# Altium PCB PCB1.pcbdoc
Units mil, origin at the board's own origin, x right, y up, seen from the top; angles counter-clockwise.
Board outline 6326.8 x 4043.3 mil, 2 copper layers (Top Layer, Bottom Layer), stack 62.2 mil thick; 51 components, 51 nets, 243 pads, 102 vias.
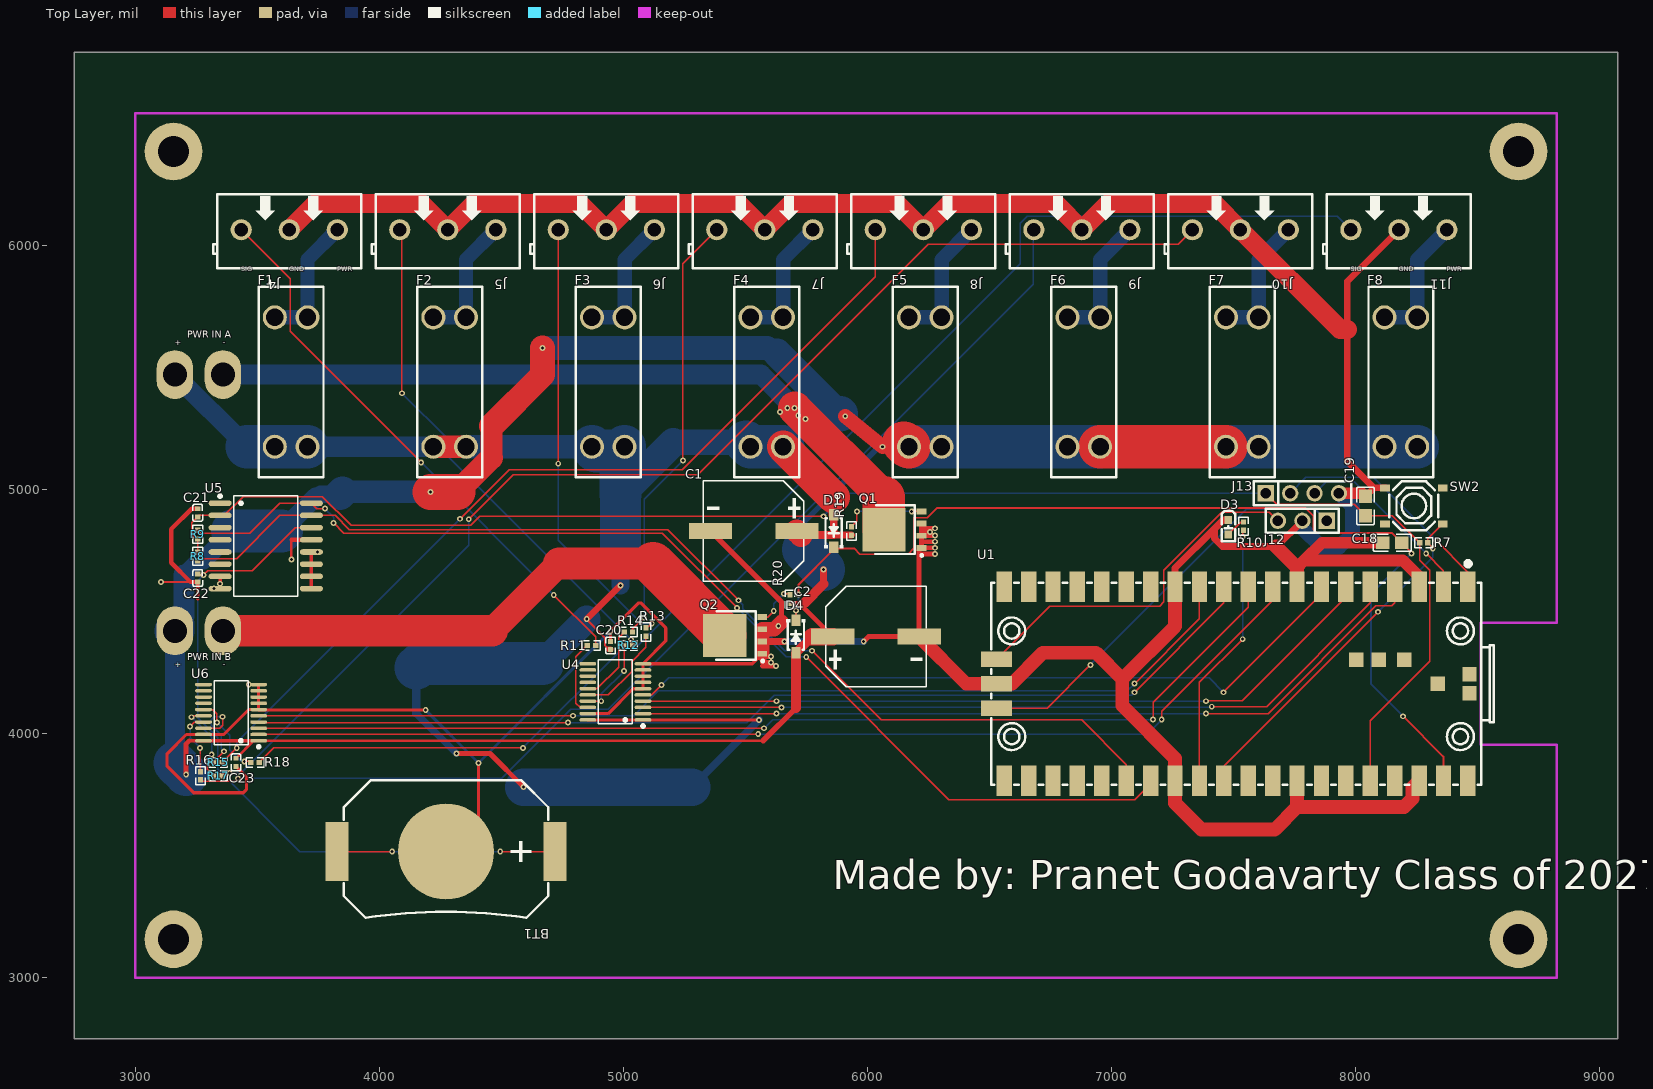
[diagram p0: Top Layer view]
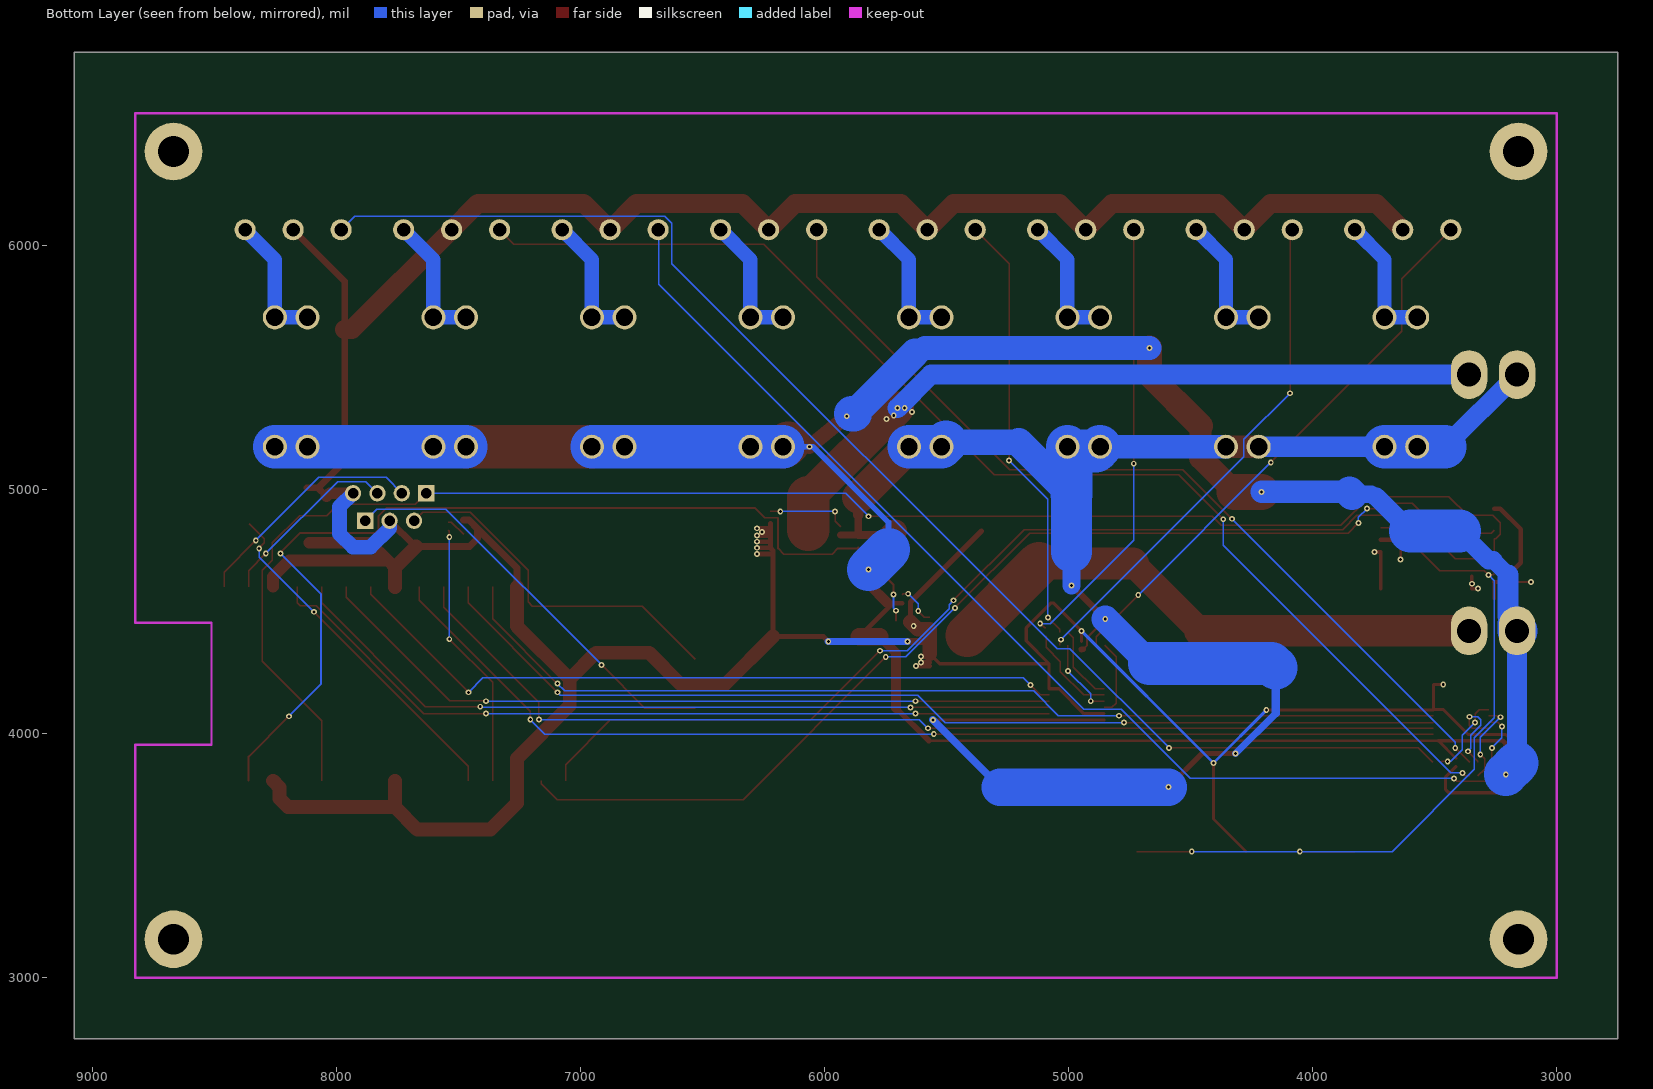
[diagram p1: Bottom Layer view, seen from below]

## Layer stack, top to bottom
Top Solder Mask Layer: solder mask 0.4, Dk 3.3
Top Layer: signal copper 1.4
Dielectric1: surface 59.4, FR4, Dk 4.5
Bottom Layer: signal copper 1.4
Bottom Solder Mask Layer: solder mask 0.4, Dk 3.3

## Board outline
9076.8,2750 2750,2750 2750,6793.3 9076.8,6793.3

## Design rules (kind name [scope] priority, off if disabled: settings)
BoardOutlineClearance copperThickness1oz [All] p0: genericclearance=10 ignorepadtopadclearanceinfootprint=FALSE except(0: Arc-SplitContinuation Track-SplitContinuation SMDPad-SplitContinuation THPad-SplitContinuation Via-SplitContinuation Fill-SplitContinuation Poly-SplitContinuation Region-SplitContinuation Text-SplitContinuation)
BoardOutlineClearance copperThickness2oz [All] p0: genericclearance=10 ignorepadtopadclearanceinfootprint=FALSE except(0: Arc-SplitContinuation Track-SplitContinuation SMDPad-SplitContinuation THPad-SplitContinuation Via-SplitContinuation Fill-SplitContinuation Poly-SplitContinuation Region-SplitContinuation Text-SplitContinuation)
BoardOutlineClearance copilot_router_net_0_spacing [All] p0: genericclearance=10 ignorepadtopadclearanceinfootprint=FALSE except(0: Arc-SplitContinuation Track-SplitContinuation SMDPad-SplitContinuation THPad-SplitContinuation Via-SplitContinuation Fill-SplitContinuation Poly-SplitContinuation Region-SplitContinuation Text-SplitContinuation)
BoardOutlineClearance otherClearance [All] p0: genericclearance=10 ignorepadtopadclearanceinfootprint=FALSE except(0: Arc-SplitContinuation Track-SplitContinuation SMDPad-SplitContinuation THPad-SplitContinuation Via-SplitContinuation Fill-SplitContinuation Poly-SplitContinuation Region-SplitContinuation Text-SplitContinuation)
Clearance copperThickness1oz [All] p1: gap=7 ignorepadtopadclearanceinfootprint=FALSE
Clearance copperThickness2oz [All] p1: gap=7 ignorepadtopadclearanceinfootprint=FALSE
Clearance copilot_router_net_0_spacing [(InNet('VBAT') OR InNet('GND') OR InNet('VIN_A') OR InNet('VIN_B') OR InNet('5V_SYS') OR InNet('3V3') OR InNet('LED_STAT_A') OR InNet('5V_ROW1') OR InNet('5V_ROW2') OR InNet('5V_ROW3') OR InNet('5V_ROW4') OR InNet('5V_ROW5') OR InNet('5V_ROW6') OR InNet('5V_ROW7') OR InNet('5V_ROW8') OR InNet('DATA1') OR InNet('DATA2') OR InNet('DATA3') OR InNet('DATA4') OR InNet('DATA5') OR InNet('DATA6') OR InNet('DATA7') OR InNet('DATA8') OR InNet('SWCLK') OR InNet('SWDIO') OR InNet('UART_TX') OR InNet('UART_RX') OR InNet('Q1_G') OR InNet('GND_IN_A') OR InNet('Q2_G') OR InNet('GND_IN_B') OR InNet('RUN') OR InNet('I2C_SDA') OR InNet('I2C_SCL') OR InNet('LED_STAT') OR InNet('DOUT1') OR InNet('DOUT2') OR InNet('DOUT3') OR InNet('DOUT4') OR InNet('DOUT5') OR InNet('DOUT6') OR InNet('DOUT7') OR InNet('DOUT8') OR InNet('DIN8') OR InNet('DIN7') OR InNet('DIN6') OR InNet('DIN5') OR InNet('DIN4') OR InNet('DIN3') OR InNet('DIN2') OR InNet('DIN1'))] p1: gap=7 ignorepadtopadclearanceinfootprint=FALSE
Clearance otherClearance [All] p1: gap=7 ignorepadtopadclearanceinfootprint=FALSE
DiffPairsRouting differentialPair [All] p1: maxuncoupledlength=10 minlimit=6 maxlimit=Infinity mostfreqgap=6 toplayer_minwidth=5 toplayer_prefwidth=10 toplayer_maxwidth=100 bottomlayer_minwidth=5 bottomlayer_prefwidth=10 bottomlayer_maxwidth=100
PasteMaskExpansion pasteMaskExpansion [All] p1: expansion=0
PlaneConnect innerPlane [All] p1: planeconnectstyle=Relief reliefexpansion=20 reliefentries=4 reliefconductorwidth=10 reliefairgap=10
PolygonConnect copperRegion [All] p1: connectstyle=Relief reliefentries=4 reliefconductorwidth=10 polygonreliefangle="90 Angle" airgapwidth=10
PolygonConnect copilot_router_zone_0_copper [All] p1: connectstyle=Direct reliefentries=4 reliefconductorwidth=10 polygonreliefangle="90 Angle" airgapwidth=10
RoutingVias viaSize [All] p1: viastyle="Through Hole" holewidth=12.0078 minholewidth=12.0078 maxholewidth=12.0078 width=12.0078 minwidth=12.0078 maxwidth=12.0078
RoutingVias copilot_router_net_0_via [All] p1: viastyle="Through Hole" holewidth=12.0078 minholewidth=12.0078 maxholewidth=12.0078 width=12.0078 minwidth=12.0078 maxwidth=12.0078
SolderMaskExpansion solderMaskExpansion [IsVia] p1: useseparateexpansions=TRUE expansion=-1000 expansionbottom=-1000
SolderMaskExpansion solderMaskExpansion [All] p2: useseparateexpansions=TRUE expansion=2 expansionbottom=2
Width copperThickness1oz [All] p1: maxlimit=45 minlimit=6 preferedwidth=6
Width copperThickness2oz [All] p1: maxlimit=100 minlimit=8 preferedwidth=10
Width copilot_router_net_0_track [All] p1: maxlimit=45 minlimit=6 preferedwidth=6
Width copilot_router_net_1_track [All] p1: maxlimit=98 minlimit=59 preferedwidth=59
Width copilot_router_net_9_track [All] p1: maxlimit=47 minlimit=6 preferedwidth=8
Width copilot_router_net_35_track [All] p1: maxlimit=177 minlimit=6 preferedwidth=138
Width copilot_router_net_34_track [All] p1: maxlimit=148 minlimit=6 preferedwidth=108

## Components (designator, comment, footprint, x,y, rotation, side; value= is the part's Value field where it differs from the comment)
BT1 "MY-2032-12" BAT-SMD_MY-2032-12 4274.2,3517 r0 top
C1 "1000uF" CAP-SMD_BD10.0-L10.3-W10.3-FD 5535,4830.7 r180 top
C2 "1000uF" CAP-SMD_BD10.0-L10.3-W10.3-FD 6035.9,4397.6 r0 top
C18 "10uF" C0805 8151.8,4782.5 r180 top
C19 "10uF" C0805 8042.2,4933.2 r90 top
C20 "100nF" C0402 4948.8,4361.6 r90 top
C21 "100nF" C0402 3256.9,4905.1 r90 top
C22 "100nF" C0402 3256.9,4638.2 r270 top
C23 "100nF" C0402 3413.2,3882.5 r270 top
D1 "B5819W SL" SOD-123_L2.7-W1.6-LS3.7-RD-1#1 5863,4830.7 r90 top
D3 "KT-0603R" LED-SMD_L1.6-W0.8-R-RD 7480.4,4845.9 r270 top
D4 "B5819W SL" SOD-123_L2.7-W1.6-LS3.7-RD-1#2 5707.9,4397.6 r270 top
F1 "3557-2" FUSE-TH_4P-L19.8-W6.7_3557-2#1 3639.8,5440.9 r90 top
F2 "3557-2" FUSE-TH_4P-L19.8-W6.7_3557-2#1 4289.4,5440.9 r90 top
F3 "3557-2" FUSE-TH_4P-L19.8-W6.7_3557-2#2 4939,5440.9 r90 top
F4 "3557-2" FUSE-TH_4P-L19.8-W6.7_3557-2#2 5588.6,5440.9 r90 top
F5 "3557-2" FUSE-TH_4P-L19.8-W6.7_3557-2#2 6238.2,5440.9 r90 top
F6 "3557-2" FUSE-TH_4P-L19.8-W6.7_3557-2#2 6887.8,5440.9 r90 top
F7 "3557-2" FUSE-TH_4P-L19.8-W6.7_3557-2#2 7537.4,5440.9 r90 top
F8 "3557-2" FUSE-TH_4P-L19.8-W6.7_3557-2#2 8187,5440.9 r90 top
J4 "KF301-5.0-3P" CONN-TH_3P-P5.00_KF301-5.0-3P#1 3631.9,6065 r180 top
J5 "KF301-5.0-3P" CONN-TH_3P-P5.00_KF301-5.0-3P#2 4281.5,6065 r180 top
J6 "KF301-5.0-3P" CONN-TH_3P-P5.00_KF301-5.0-3P#2 4931.1,6065 r180 top
J7 "KF301-5.0-3P" CONN-TH_3P-P5.00_KF301-5.0-3P#2 5580.7,6065 r180 top
J8 "KF301-5.0-3P" CONN-TH_3P-P5.00_KF301-5.0-3P#2 6230.3,6065 r180 top
J9 "KF301-5.0-3P" CONN-TH_3P-P5.00_KF301-5.0-3P#2 6879.9,6065 r180 top
J10 "KF301-5.0-3P" CONN-TH_3P-P5.00_KF301-5.0-3P#2 7529.5,6065 r180 top
J11 "KF301-5.0-3P" CONN-TH_3P-P5.00_KF301-5.0-3P#2 8179.1,6065 r180 top
J12 "PZ254V-11-03P" HDR-TH_3P-P2.54-V-M 7783.5,4872.2 r180 top
J13 "PZ254V-11-04P" HDR-TH_4P-P2.54-V-M 7783.5,4985.2 r0 top
Q1 "PSMN1R0-30YLDX" LFPAK56-4_L4.9-W4.2-P1.27-LS6.2-BL#1 6145.9,4835.9 r90 top
Q2 "PSMN1R0-30YLDX" LFPAK56-4_L4.9-W4.2-P1.27-LS6.2-BL#2 5493.9,4402.8 r90 top
R7 "10kΩ" R0402#1 8281.1,4782.5 r180 top
R8 "4.7kΩ" R0402#2 3256.9,4726.6 r90 top
R9 "4.7kΩ" R0402#2 3256.9,4816.7 r270 top
R10 "1kΩ" R0402#3 7542.4,4850.4 r90 top
R11 "33Ω" R0402#2 4870.1,4361.6 r0 top
R12 "33Ω" R0402#1 5021.4,4361.6 r0 top
R13 "33Ω" R0402#1 5094,4416.6 r90 top
R14 "33Ω" R0402#1 5021.4,4416.6 r0 top
R15 "33Ω" R0402#1 3340.6,3882.5 r0 top
R16 "33Ω" R0402#1 3268,3827.5 r270 top
R17 "33Ω" R0402#1 3340.6,3827.5 r0 top
R18 "33Ω" R0402#2 3492,3882.5 r0 top
R19 "10kΩ" R0402#1 5935.8,4830.7 r90 top
R20 "10kΩ" R0402#2 5683.4,4551.7 r90 top
SW2 "TS-1187A-B-A-B" SW-SMD_4P-L5.1-W5.1-P3.70-LS6.5-TL_H1.5 8240.3,4933.2 r180 top
U1 "Raspberry Pi Pico 2" COMM-SMD_L51.0-W21.0-P2.54_SC0916 7499.4,4204.6 r180 top
U4 "SN74AHCT245PWR" TSSOP-20_L6.5-W4.4-P0.65-LS6.4-BL#1 4968.5,4171.6 r90 top
U5 "DS3231SN#T&R" SOIC-16_L10.3-W7.5-P1.27-LS10.3-BL 3535.6,4769.5 r270 top
U6 "SN74AHCT245PWR" TSSOP-20_L6.5-W4.4-P0.65-LS6.4-BL#2 3393.6,4086.2 r90 top

## Footprints (in the part's own frame and the unit in brackets; to place one, negate y for a bottom-side part, rotate by r counter-clockwise, add the part's x,y. Pads: shape width x height; smd on the part's side, far side on the other; paste and mask are expansions set on the pad)
BAT-SMD_MY-2032-12 [mil]
  rect 94.5x240.2 smd paste-3937 mask+2: 1(-446.8,0) 1(446.9,0)
  round 393.7 smd paste-3937 mask+2: 2(0,0)
  silkscreen extent -419,-272 419,292
C0402 [mil]
  rect 19.7x21.3 smd: 1(-16.6,0) 2(16.5,0)
  silkscreen extent -34,-20 34,20
C0805 [mil]
  rect 55.5x53.1 smd paste-3937 mask+2: 1(-39.3,0) 2(39.4,0)
  silkscreen extent -77,-36 77,36
CAP-SMD_BD10.0-L10.3-W10.3-FD [mil]
  rect 177.2x65 smd: 1(-177.1,0) 2(177.2,0)
  silkscreen extent -206,-206 206,206
COMM-SMD_L51.0-W21.0-P2.54_SC0916 [mil]
  rect 63x126 smd: 1(-962.4,-397.1) 2(-862.4,-397.1) 3(-762.4,-397.1) 4(-662.4,-397.1) 5(-562.4,-397.1) 6(-462.4,-397.1) 7(-362.4,-397.1) 8(-262.4,-397.1) 9(-162.4,-397.1) 10(-62.4,-397.1) 11(37.6,-397.1) 12(137.6,-397.1) 13(237.6,-397.1) 14(337.6,-397.1) 15(437.6,-397.1) 16(537.6,-397.1) 17(637.6,-397.1) 18(737.6,-397.1) 19(837.6,-397.1) 20(937.6,-397.1) 21(937.6,397.2) 22(837.6,397.2) 23(737.6,397.2) 24(637.6,397.2) 25(537.6,397.2) 26(437.6,397.2) 27(337.6,397.2) 28(237.6,397.2) 29(137.6,397.2) 30(37.6,397.2) 31(-62.4,397.2) 32(-162.4,397.2) 33(-262.4,397.2) 34(-362.4,397.2) 35(-462.4,397.2) 36(-562.4,397.2) 37(-662.4,397.2) 38(-762.4,397.2) 39(-862.4,397.2) 40(-962.4,397.2)
  rect 126x63 smd: 41(969.1,-100) 42(969.1,0) 43(969.1,100)
  rect 59.1x59.1 smd: TP1(-839.2,0) TP2(-969.1,39.4) TP3(-969.1,-39.3) TP4(-701.4,-98.4) TP5(-598,-98.4) TP6(-504.5,-98.4)
  silkscreen extent -1068,-502 992,413
CONN-TH_3P-P5.00_KF301-5.0-3P#1 [mil]
  round 86.6 hole 55.1: 1(-196.8,0) 2(0,0) 3(196.9,0)
  silkscreen extent -295,-146 311,158
CONN-TH_3P-P5.00_KF301-5.0-3P#2 [mil]
  round 86.6 hole 55.1: 1(-196.9,0) 2(0,0) 3(196.8,0)
  silkscreen extent -295,-146 311,158
FUSE-TH_4P-L19.8-W6.7_3557-2#1 [mil]
  round 98.4 hole 70.9 paste+0 mask+2: 1(-265.1,67) 2(-265.1,-66.9) 3(265.2,67) 4(265.2,-66.9)
  silkscreen extent -390,-133 390,133
FUSE-TH_4P-L19.8-W6.7_3557-2#2 [mil]
  round 98.4 hole 70.9 paste+0 mask+2: 1(-265.1,66.9) 2(-265.1,-66.9) 3(265.2,66.9) 4(265.2,-66.9)
  silkscreen extent -390,-133 390,133
HDR-TH_3P-P2.54-V-M [mil]
  rect 66.9x66.9 hole 43.3: 1(-100,0)
  round 66.9 hole 43.3: 2(0,0) 3(100,0)
  silkscreen extent -150,-49 150,49
HDR-TH_4P-P2.54-V-M [mil]
  rect 66.9x66.9 hole 43.3: 1(-150,0)
  round 66.9 hole 43.3: 2(-50,0) 3(50,0) 4(150,0)
  silkscreen extent -200,-50 200,50
LED-SMD_L1.6-W0.8-R-RD [mil]
  rect 31.5x31.5 smd: 1(29.6,0) 2(-29.5,0)
  silkscreen extent -67,-28 58,28
LFPAK56-4_L4.9-W4.2-P1.27-LS6.2-BL#1 [mil]
  rect 23.4x39.4 smd: 1(-75,-77) 2(-25,-77) 3(25,-77) 4(75,-77)
  rect 177.2x177.2 smd: 5(0,77.1)
  silkscreen extent -110,-83 100,113
LFPAK56-4_L4.9-W4.2-P1.27-LS6.2-BL#2 [mil]
  rect 23.4x39.4 smd: 1(-75,-77) 2(-25,-77) 3(25,-77) 4(75,-77)
  rect 177.2x177.2 smd: 5(0,77)
  silkscreen extent -110,-83 100,113
R0402#1 [mil]
  rect 22.3x21.3 smd paste-3937 mask+2: 1(-17,0) 2(17.1,0)
  silkscreen extent -37,-20 37,20
R0402#2 [mil]
  rect 22.3x21.3 smd paste-3937 mask+2: 1(-17.1,0) 2(17,0)
  silkscreen extent -37,-20 37,20
R0402#3 [mil]
  rect 22.3x21.3 smd paste-3937 mask+2: 1(-17,0) 2(17,0)
  silkscreen extent -37,-20 37,20
SOD-123_L2.7-W1.6-LS3.7-RD-1#1 [mil]
  rect 47.2x37.4 smd: 1(-66.9,0) 2(66.9,0)
  silkscreen extent -71,-38 53,38
SOD-123_L2.7-W1.6-LS3.7-RD-1#2 [mil]
  rect 47.2x37.4 smd: 1(-67,0) 2(66.9,0)
  silkscreen extent -71,-38 53,38
SOIC-16_L10.3-W7.5-P1.27-LS10.3-BL [mil]
  oval 22.6x94.5 smd: 1(-175,-187.1) 2(-125,-187.1) 3(-75,-187.1) 4(-25,-187.1) 5(25,-187.1) 6(75,-187.1) 7(125,-187.1) 8(175,-187.1) 9(175,187) 10(125,187) 11(75,187) 12(25,187) 13(-25,187) 14(-75,187) 15(-125,187) 16(-175,187)
  silkscreen extent -210,-193 206,131
SW-SMD_4P-L5.1-W5.1-P3.70-LS6.5-TL_H1.5 [mil]
  rect 39.4x29.5 smd: 1(-118.1,73.8) 2(118.1,73.8) 3(-118.1,-73.9) 4(118.1,-73.9)
  silkscreen extent -100,-100 100,100
TSSOP-20_L6.5-W4.4-P0.65-LS6.4-BL#1 [mil]
  oval 14.3x68.6 smd: 1(-115.2,-113) 2(-89.6,-113) 3(-64,-113) 4(-38.4,-113) 5(-12.8,-113) 6(12.8,-113) 7(38.4,-113) 8(64,-113) 9(89.5,-113) 10(115.1,-113) 11(115.1,113) 12(89.5,113) 13(64,113) 14(38.4,113) 15(12.8,113) 16(-12.8,113) 17(-38.4,113) 18(-64,113) 19(-89.6,113) 20(-115.2,113)
  silkscreen extent -146,-119 131,70
TSSOP-20_L6.5-W4.4-P0.65-LS6.4-BL#2 [mil]
  oval 14.3x68.6 smd: 1(-115.1,-113) 2(-89.5,-113) 3(-64,-113) 4(-38.4,-113) 5(-12.8,-113) 6(12.8,-113) 7(38.4,-113) 8(64,-113) 9(89.6,-113) 10(115.2,-113) 11(115.2,113.1) 12(89.6,113.1) 13(64,113.1) 14(38.4,113.1) 15(12.8,113.1) 16(-12.8,113.1) 17(-38.4,113.1) 18(-64,113.1) 19(-89.5,113.1) 20(-115.1,113.1)
  silkscreen extent -146,-119 131,70

## Free pads (board coordinates)
  oval 150x200 hole 98.4 paste+0 mask+0: COPILOTJ11(3163.4,5471.7) COPILOTJ12(3360.2,5471.7) COPILOTJ21(3163.4,4421.7) COPILOTJ22(3360.2,4421.7)
  round 236.2 hole 126 unplated paste+0 mask+0.2: MH1(3157.5,6385.8) MH2(8669.3,6385.8) MH3(8669.3,3157.5) MH4(3157.5,3157.5)

## Via types
v1: diameter 24, hole 12, Top Layer to Bottom Layer, 102 vias

## Nets (pads, with @x,y where several pads share a name; then routed paths per layer and width w, separated by ;. In a path a pad name is that pad's centre, name@x,y a point inside that pad or via, vN(x,y) a via of type N, cw(c..) or ccw(c..) an arc to the next point about the centre after c; other vN are vias at no path point)
3V3: C19.1 C21.1 J13.1 R7.2 R8.2 R9.2 U1.36 U5.2 | length 6490.1
  Top Layer w5.9: R8.2 R9.2 3251.2,4799.7 3233.2,4817.7 3233.2,4864.9 C21.1 3262.8,4894.5 U5.2 3365.9,4894.5 3442.7,4971.3 3767.5,4971.3 3885.6,4853.2 4375.8,4853.2 4413.3,4890.8 v1(5820.5,4890.8) ; J13.1 7678.1,4940.6 7995.4,4940.6 C19.1 8152.7,4893.9 R7.2 8264,4710.5 8305.4,4669.2 8305.4,4296.1 8061.8,4052.5 U1.36
  Bottom Layer w5.9: v1(5820.5,4890.8) 5915,4985.2 J13.1
5V_ROW1: F1.3 F1.4 J4.1 | length 543.3
  Bottom Layer w59.1: F1.3 F1.4 3706.7,5942.9 J4.1
5V_ROW2: F2.3 F2.4 J5.1 | length 543.3
  Bottom Layer w59.1: F2.3 F2.4 4356.3,5942.9 J5.1@4478.3,6065
5V_ROW3: F3.3 F3.4 J6.1 | length 543.3
  Bottom Layer w59.1: F3.3 F3.4 5005.9,5942.9 J6.1
5V_ROW4: F4.3 F4.4 J7.1 | length 543.3
  Bottom Layer w59.1: F4.3 F4.4 5655.5,5942.9 J7.1
5V_ROW5: F5.3 F5.4 J8.1 | length 543.3
  Bottom Layer w59.1: F5.3 F5.4 6305.1,5942.9 J8.1
5V_ROW6: F6.3 F6.4 J9.1 | length 543.3
  Bottom Layer w59.1: F6.3 F6.4 6954.7,5942.9 J9.1
5V_ROW7: F7.3 F7.4 J10.1 | length 543.3
  Bottom Layer w59.1: F7.3 F7.4 7604.3,5942.9 J10.1
5V_ROW8: F8.3 F8.4 J11.1 | length 543.3
  Bottom Layer w59.1: F8.3 F8.4 8253.9,5942.9 J11.1
5V_SYS: C18.1 D1.1 D4.1 U1.39 | length 4125.2
  Top Layer w7.9: D4.1 v1(5707.9,4504) ; v1(5718.7,4569.9) 5718.7,4609.3 D1.1@5868.3,4758.9 ; D1.1 5867.9,4758.9 D1.1@5868.3,4758.9 ; v1(8196.5,4071.2) 8361.8,3905.9 U1.39 ; v1(8230.5,4737.9) 8230.5,4743.1 8191.2,4782.5 8151.8,4821.9 7844.7,4821.9 7828.9,4837.6 7828.9,4892.7 7797.5,4924.2 6285.6,4924.2 6246.3,4884.8 6193.5,4884.8 6191.2,4882.5 6191.2,4758.9 6167.5,4735.2 5970.7,4735.2 5947.1,4758.9 D1.1@5868.3,4758.9
  Bottom Layer w7.9: v1(5707.9,4504) 5718.7,4514.8 v1(5718.7,4569.9) ; v1(8196.5,4071.2) 8065.2,4202.5 8065.2,4572.6 v1(8230.5,4737.9)
DATA1: J4.3 R11.2 | length 2304.9
  Top Layer w5.9: J4.3 3635.2,5864.9 3635.2,5649 v1(4172.6,5111.6) ; v1(4715.9,4568.3) 4887.1,4397 R11.2
  Bottom Layer w5.9: v1(4172.6,5111.6) v1(4715.9,4568.3)
DATA2: J5.3 R12.2 | length 2098.5
  Top Layer w5.9: J5.3@4084.6,6065 4093.6,6056 v1(4093.6,5395) ; v1(5032.6,4385.2) 5038.5,4379.3 R12.2
  Bottom Layer w5.9: v1(4093.6,5395) 4282.6,5206.1 4282.6,5135.2 v1(5032.6,4385.2)
DATA3: J6.3 R13.2 | length 1827.5
  Top Layer w5.9: v1(4734.3,5106.4) J6.3 ; R13.2 5099.9,4433.7 v1(5117.6,4451.4)
  Bottom Layer w5.9: v1(4734.3,5106.4) 4734.3,4793.4 5076.3,4451.4 v1(5117.6,4451.4)
DATA4: J7.3 R14.2 | length 1791.4
  Top Layer w5.9: R14.2 5038.5,4428.4 v1(5085.7,4475.7) ; v1(5245.2,5119.4) 5245.2,5926.3 J7.3
  Bottom Layer w5.9: v1(5085.7,4475.7) 5085.7,4959.9 v1(5245.2,5119.4)
DATA5: J8.3 R15.2 | length 3705.9
  Top Layer w5.9: R15.2 v1(3416.7,3941.6) ; v1(4332.1,4880.6) 4532.9,5081.3 5241.5,5081.3 6033.5,5873.3 J8.3
  Bottom Layer w5.9: v1(3416.7,3941.6) 3416.7,3965.2 v1(4332.1,4880.6)
DATA6: J9.3 R16.2 | length 4483.6
  Top Layer w5.9: R16.2 3273.9,3804.5 3409.8,3804.5 v1(3421.6,3816.4)
  Bottom Layer w5.9: v1(3421.6,3816.4) 4502.3,3816.4 4785.8,4099.8 4939.3,4099.8 6681.4,5841.9 6681.4,6063.3 J9.3
DATA7: J10.3 R17.2 | length 4964
  Top Layer w5.9: R17.2 3375.4,3827.5 v1(3387.2,3839.3) ; v1(4367.5,4878.7) 4550.6,5061.7 5306.5,5061.7 6251.4,6006.6 7274.3,6006.6 J10.3
  Bottom Layer w5.9: v1(3387.2,3839.3) 3434.4,3839.3 4367.5,4772.4 v1(4367.5,4878.7)
DATA8: J11.3 R18.2 | length 5520.4
  Top Layer w5.9: R18.2 3568.1,3941.6 v1(4589.7,3941.6)
  Bottom Layer w5.9: v1(4589.7,3941.6) 4995.5,4347.4 5048.7,4347.4 6627.1,5925.8 6627.1,6091.2 6656.6,6120.7 7926.6,6120.7 J11.3
DIN1: U1.4 U4.2 | length 3334.2
  Top Layer w5.9: U4.2 v1(5629.3,4082) ; v1(7389.2,4082) 7643.1,4082 8085.1,4524 8150,4524 8161.8,4535.8 U1.4
  Bottom Layer w5.9: v1(5629.3,4082) v1(7389.2,4082)
DIN2: U1.5 U4.3 | length 3223.6
  Top Layer w5.9: U4.3 v1(5649.4,4107.6) ; v1(7412.2,4110.6) 7636.6,4110.6 8061.8,4535.8 U1.5
  Bottom Layer w5.9: v1(5649.4,4107.6) 7409.3,4107.6 v1(7412.2,4110.6)
DIN3: U1.6 U4.4 | length 3099.1
  Top Layer w5.9: U4.4 v1(5628.1,4133.2) ; v1(7388,4133.2) 7389,4134.2 7536.6,4134.2 7961.8,4559.4 U1.6
  Bottom Layer w5.9: v1(5628.1,4133.2) v1(7388,4133.2)
DIN4: U1.7 U4.5 | length 3030.6
  Top Layer w5.9: U4.5 5116.7,4158.8 v1(5157.1,4199.2) ; v1(7460.3,4169.6) 7861.8,4571.2 U1.7
  Bottom Layer w5.9: v1(5157.1,4199.2) 5186.6,4228.7 7401.2,4228.7 v1(7460.3,4169.6)
DIN5: U1.9 U6.2 | length 4458.3
  Top Layer w5.9: U6.2 3508.3,3998.4 v1(5553.6,3998.4) ; v1(7207.1,4057.4) 7207.1,4092.9 7661.8,4547.6 U1.9
  Bottom Layer w5.9: v1(5553.6,3998.4) 7148,3998.4 v1(7207.1,4057.4)
DIN6: U1.10 U6.3 | length 4385.8
  Top Layer w5.9: U6.3 v1(5577.8,4022.2) ; v1(7172.1,4057.4) 7172.1,4128.3 7561.8,4518.1 U1.10
  Bottom Layer w5.9: v1(5577.8,4022.2) 5613,4057.4 v1(7172.1,4057.4)
DIN7: U1.11 U6.4 | length 4225.1
  Top Layer w5.9: U6.4 3508.8,4045.6 v1(4774.8,4045.6) ; v1(7095.7,4169.6) 7461.8,4535.8 U1.11
  Bottom Layer w5.9: v1(4774.8,4045.6) 5507.1,4045.6 5619.3,4157.8 7083.9,4157.8 v1(7095.7,4169.6)
DIN8: U1.12 U6.5 | length 4150.7
  Top Layer w5.9: U6.5 v1(4794.6,4073.4) ; v1(7096.1,4205.1) 7361.8,4470.8 U1.12
  Bottom Layer w5.9: v1(4794.6,4073.4) 5042.7,4073.4 5144.8,4175.5 7066.6,4175.5 v1(7096.1,4205.1)
DOUT1: R11.1 U4.18 | length 312
  Top Layer w5.9: R11.1 4806.4,4315 4806.4,4125.3 4824.1,4107.6 U4.18
DOUT2: R12.1 U4.17 | length 322.2
  Top Layer w5.9: U4.17 v1(4910.4,4133.2) ; v1(5004.4,4256.7) R12.1
  Bottom Layer w5.9: v1(4910.4,4133.2) 4910.4,4162.7 v1(5004.4,4256.7)
DOUT3: R13.1 U4.16 | length 389.1
  Top Layer w5.9: U4.16 4940,4158.8 5034.5,4253.3 5034.5,4294.6 5093.5,4353.7 5093.5,4399.1 R13.1
DOUT4: R14.1 U4.15 | length 315.7
  Top Layer w5.9: U4.15 4892.7,4184.4 4981.3,4273 4981.3,4393.5 R14.1
DOUT5: R15.1 U6.18 | length 385.3
  Top Layer w5.9: U6.18 3347.3,4022.2 3359.1,4034.1 v1(3359.1,4069.5) ; R15.1 3323.6,3886.3 v1(3365,3927.8)
  Bottom Layer w5.9: v1(3359.1,4069.5) 3323.7,4069.5 3311.9,4057.7 3311.9,4034.1 3353.2,3992.7 3353.2,3939.6 v1(3365,3927.8)
DOUT6: R16.1 U6.17 | length 265.3
  Top Layer w5.9: v1(3225.6,4030.1) 3243.3,4047.8 U6.17 ; v1(3266.9,3941.5) 3266.9,3845.7 R16.1
  Bottom Layer w5.9: v1(3225.6,4030.1) 3225.6,3982.9 v1(3266.9,3941.5)
DOUT7: R17.1 U6.16 | length 344.3
  Top Layer w5.9: v1(3231.5,4067.5) 3237.4,4073.4 U6.16 ; v1(3314.1,3914) 3296.4,3896.3 3296.4,3854.7 R17.1
  Bottom Layer w5.9: v1(3231.5,4067.5) 3314.1,3984.9 v1(3314.1,3914)
DOUT8: R18.1 U6.15 | length 339.4
  Top Layer w5.9: U6.15 3317.8,4099 3335.5,4081.3 v1(3335.5,4045.9) ; v1(3447.7,3886.4) 3471,3886.4 R18.1
  Bottom Layer w5.9: v1(3335.5,4045.9) 3388.6,3992.7 3388.6,3933.7 3435.9,3886.4 v1(3447.7,3886.4)
GND: BT1.2 C1.2 C2.2 C18.2 C19.2 C20.2 C21.2 C22.2 C23.2 D3.2 J4.2 J5.2 J6.2 J7.2 J8.2 J9.2 J10.2 J11.2 J12.2 J13.4 Q1.1 Q1.2 Q1.3 Q2.1 Q2.2 Q2.3 SW2.4 U1.3 U1.8 U1.13 U1.28 U1.33 U1.38 U1.42 U4.6 U4.7 U4.8 U4.9 U4.10 U4.19 U5.5 U5.6 U5.7 U5.8 U5.9 U5.10 U5.11 U5.12 U5.13 U6.6 U6.7 U6.8 U6.9 U6.10 U6.19 | length 20248.3
  Top Layer w10: v1(3106.9,4621.7) C22.2 ; v1(3641,4714.5) 3641,4794.5
  Top Layer w12.9: 3256.9,4551.7 C22.2 ; C23.2 3456.3,3822.9 3456.3,3770.6 3443.4,3757.7 3239.8,3757.7 3131.5,3866 3131.5,3917.9 3210.2,3996.7 U6.19 3363.5,3996.7 3465.8,4099 U6.6 ; v1(3465.8,4201.4) U6.10 U6.9 U6.8 U6.7 U6.6 ; v1(4191,4096.4) 3509.2,4096.4 U6.6 ; BT1.2 4407.5,3650.2 v1(4407.5,3879.9) ; U4.19 4938.4,4082 5040.8,4184.4 U4.6 U4.7 U4.8 5081.5,4261.2 U4.10 ; C20.2 v1(4948.8,4421.2) 5063.5,4535.9 5072.8,4535.9 5174.9,4433.8 5174.9,4380.1 U4.10 ; Q2.1 5529.8,4286.7 U4.10
  Top Layer w15: v1(3323.5,4594.5) U5.8 v1(3348.5,4614.5) U5.7 ; U5.9 U5.10 U5.11 U5.12 v1(3747.6,4744.5)
  Top Layer w17.7: C22.2 3227.3,4621.7 3148.6,4700.4 3148.6,4838.2 3232,4921.6 C21.2 ; 3641,4794.5 U5.13
  Top Layer w20: 5570.9,4276.7 v1(5626,4276.7) ; 5570.9,4291.7 v1(5606,4291.7) ; Q2.1@5570.9,4316.7 v1(5606,4316.7) ; C2.2 6213.1,4751.1 Q1.1 Q1.2 Q1.3 ; 6222.9,4736.7 v1(6277.9,4736.7) ; Q1.1@6222.9,4761.7 v1(6277.9,4761.7) ; 6222.9,4786.7 v1(6277.9,4786.7) ; Q1.2@6222.9,4811.7 v1(6277.9,4811.7) ; 6222.9,4826.7 v1(6257.9,4826.7) ; 6222.9,4841.7 v1(6277.9,4841.7)
  Top Layer w21.1: C1.2 5649,4539.5 ; v1(5985.9,4377.8) 6005.7,4397.6 C2.2
  Top Layer w22: 5649,4457.4 5649,4539.5
  Top Layer w26.6: C19.2 8076.6,5007.1 ; SW2.4 8076.6,5007.1 ; J11.2 7968.4,5854.2 7968.4,5656.7 7968.4,5115.3 8076.6,5007.1
  Top Layer w28.3: U1.13 7261.8,4678.9 7422.7,4839.8 ; D3.2 7458.3,4875.4 7422.7,4839.8 ; J12.2 7678.4,4767.1 7674.9,4767.1 7455.3,4767.1 7422.7,4799.7 7422.7,4839.8
  Top Layer w30: Q2.2 v1(5661.1,4377.8)
  Top Layer w47.8: 7761.8,4680.2 7791.6,4710 ; 7791.4,4710 7791.6,4710 ; J13.4 8029.5,4985.2 C19.2 ; C18.2 7864.1,4782.5 7791.6,4710 ; U1.3 8261.8,4643.1 8194.9,4710 7791.6,4710
  Top Layer w56.7: C2.2 6406.1,4204.6 U1.42 6593.2,4204.6 6720.5,4331.8 6937,4331.8 7045.3,4223.6 ; U1.13 7261.8,4440.1 7045.3,4223.6 ; 7674.9,4767.1 7761.8,4680.2 U1.8 ; U1.33 7761.8,3699.2 ; U1.38 8234.3,3779.9 8234.3,3733.9 8199.5,3699.2 7761.8,3699.2 ; 7045.3,4223.6 7045.3,4115.3 7261.8,3898.8 U1.28 7261.8,3716.1 7370.1,3607.8 7670.5,3607.8 7761.8,3699.2
  Top Layer w60: Q2.1 Q2.2 Q2.3 5619.5,4427.8 5649,4457.4
  Top Layer w78: J4.2 3740.2,6173.2 4173.2,6173.2 J5.2 4389.8,6173.2 4822.8,6173.2 J6.2 5039.4,6173.2 5472.4,6173.2 J7.2 5689,6173.2 6122.1,6173.2 J8.2 6338.6,6173.2 6771.7,6173.2 J9.2 6988.2,6173.2 7421.3,6173.2 J10.2 7937.8,5656.7 7968.4,5656.7
  Bottom Layer w12.9: v1(4191,4096.4) v1(4407.5,3879.9) v1(4948.8,4421.2)
  Bottom Layer w30: v1(5661.1,4377.8) v1(5985.9,4377.8)
  Bottom Layer w60.2: J12.2 7783.5,4842.7 7862.2,4764 7933.5,4764 7989.2,4819.7 7989.2,4929.6 J13.4
  other v1: 5636,4441.7
GND_IN_A: pad.COPILOTJ12 Q1.5 | length 3049.3
  Top Layer w137.2: v1(5702.8,5333.9) 6068.8,4967.8
  Top Layer w174.7: Q1.5 6068.8,4967.8
  Bottom Layer w81.5: pad.COPILOTJ12 5565,5471.7 v1(5702.8,5333.9)
  other v1: 5747.8,5288.9 5717.8,5303.9 5642.8,5318.9 5672.8,5333.9
GND_IN_B: pad.COPILOTJ22 Q2.5 | length 2292.7
  Top Layer w108: 4462.6,4421.7 4738.2,4697.2
  Top Layer w130.5: pad.COPILOTJ22 4462.6,4421.7
  Top Layer w132.2: 4738.2,4697.2 5122.5,4697.2
  Top Layer w177.2: 5122.5,4697.2 Q2.5
I2C_SCL: R9.1 U1.27 U5.16 | length 4517.3
  Top Layer w5.9: R9.1 3268.7,4822 3471,4822 3593.6,4944.5 U5.16 3744.5,4922.6 v1(3778,4922.6) ; v1(3813.4,4863.5) 3854.7,4822.2 5159.9,4822.2 v1(5466.9,4515.1) ; v1(5750.4,4314.3) 6335.1,3729.7 7096.9,3729.7 7161.8,3794.6 U1.27
  Bottom Layer w5.9: v1(3778,4922.6) 3813.4,4887.2 v1(3813.4,4863.5) ; v1(5466.9,4515.1) 5667.7,4314.3 v1(5750.4,4314.3)
I2C_SDA: R8.1 U1.26 U5.15 | length 4380.9
  Top Layer w5.9: R8.1 3264.7,4717.4 3416.4,4717.4 3593.6,4894.5 U5.15 3820.2,4894.5 3878.8,4836 5183.9,4836 v1(5473.2,4546.6) ; v1(5774.4,4339.9) 6057.9,4056.4 6878.8,4056.4 7061.8,3873.4 U1.26
  Bottom Layer w5.9: v1(5473.2,4546.6) 5491,4528.9 5491,4511.2 5662.2,4339.9 v1(5774.4,4339.9)
LED_STAT: R10.1 U1.29 | length 1100.8
  Top Layer w5.9: U1.29 7361.8,4210 v1(7539,4387.2) ; v1(7539,4806.4) 7539,4830 R10.1
  Bottom Layer w5.9: v1(7539,4387.2) v1(7539,4806.4)
LED_STAT_A: D3.1 R10.2 | length 83.2
  Top Layer w5.9: D3.1 7531.5,4867.4 R10.2
Q1_G: Q1.4 R19.2 | length 337.1
  Top Layer w5.9: R19.2 5958.2,4870.1 v1(5958.2,4910.9) ; v1(6182.6,4910.9) Q1.4
  Bottom Layer w5.9: v1(5958.2,4910.9) v1(6182.6,4910.9)
Q2_G: Q2.4 R20.2 | length 171.4
  Top Layer w5.9: Q2.4 5592.5,4477.8 v1(5617.2,4502.5) ; v1(5658.5,4573.4) 5678.7,4573.4 R20.2
  Bottom Layer w5.9: v1(5617.2,4502.5) 5617.2,4532 v1(5658.5,4573.4)
RUN: R7.1 SW2.1 U1.30 | length 1440
  Top Layer w5.9: U1.30 7461.8,3867.5 v1(8093.7,4499.4) ; v1(8318.1,4759.2) 8318.1,4762.5 R7.1 8298.1,4799.1 SW2.1
  Bottom Layer w5.9: v1(8093.7,4499.4) 8318.1,4723.8 v1(8318.1,4759.2)
SWCLK: J12.1 U1.43 | length 1710.3
  Top Layer w5.9: U1.43 6738,4104.6 v1(6915.2,4281.7)
  Bottom Layer w5.9: v1(6915.2,4281.7) 7553,4919.5 7836.2,4919.5 J12.1
SWDIO: J12.3 U1.41 | length 1493.1
  Top Layer w5.9: U1.41 6748.8,4523.1 7198.6,4523.1 7216.3,4540.8 7216.3,4670.7 7452.6,4906.9 7648.8,4906.9 J12.3
UART_RX: J13.3 U1.2 | length 765
  Top Layer w5.9: v1(8291,4738.5) 8361.8,4667.7 U1.2
  Bottom Layer w5.9: J13.3 7880.7,5032.5 7997,5032.5 v1(8291,4738.5)
UART_TX: J13.2 U1.1 | length 976.2
  Top Layer w5.9: v1(8331.9,4791.7) 8461.8,4661.8 U1.1
  Bottom Layer w5.9: J13.2 7798.4,5050.2 8073.4,5050.2 v1(8331.9,4791.7)
VBAT: BT1.1 C22.1 U5.14 | length 3136.5
  Top Layer w5.9: C22.1 3260.8,4650.8 v1(3280.1,4650.8) 3297.8,4668.5 3480.9,4668.5 3656.9,4844.5 U5.14 ; BT1.1@3827.4,3517 v1(4053.7,3517) ; v1(4496.7,3517) BT1.1@4721.1,3517
  Bottom Layer w5.9: v1(3280.1,4650.8) 3256.5,4627.2 3256.5,4066.2 3339.2,3983.5 3339.2,3853.6 3675.8,3517 v1(4496.7,3517)
VIN_A: C1.1 C20.1 D1.2 F1.1 F1.2 F2.1 F2.2 F3.1 F3.2 F4.1 F4.2 pad.COPILOTJ11 R19.1 U4.1 U4.20 | length 7650.4
  Top Layer w8.4: 4925.2,4362.2 4925.2,4393.7
  Top Layer w8.7: 4925.2,4362.2 C20.1@4941,4346.5
  Top Layer w9.3: v1@4850.4,4468.5 4925.2,4393.7
  Top Layer w11.4: U4.20 U4.1 v1(5557.1,4056.4)
  Top Layer w20.2: v1(4316.9,3918.6) 4454.7,3918.6 v1(4592.5,3780.8)
  Top Layer w23.5: C20.1@4941,4346.5 4948.8,4346.5 C20.1
  Top Layer w26.3: v1(4851.1,4469.8) v1(4988.9,4607.6)
  Top Layer w28.4: 5863,4813.7 R19.1
  Top Layer w32.2: 5863,4813.7 D1.2
  Top Layer w32.7: C1.1@5729.2,4813.7 5863,4813.7
  Top Layer w43.3: D1.2 5863,4968.3
  Top Layer w93.3: F2.1 F2.2
  Top Layer w95.4: C1.1 C1.1@5729.2,4813.7
  Top Layer w133.1: F4.2 5863,4968.3
  Bottom Layer w29.4: 4152.7,4082.9 v1(4316.9,3918.6)
  Bottom Layer w30.7: 5281.5,3780.8 v1(5557.1,4056.4)
  Bottom Layer w33.7: 4152.7,4082.9 4152.7,4270.1
  Bottom Layer w72.6: v1(4988.9,4607.6) 4988.9,4745.4
  Bottom Layer w77: pad.COPILOTJ11 3459.3,5175.8
  Bottom Layer w84.6: F1.2 F2.1
  Bottom Layer w95.9: F2.2 F3.1
  Bottom Layer w105.9: 5205.4,5194.2 F4.1@5503.2,5194.2
  Bottom Layer w111.3: 4669.2,4287.9 v1(4851.1,4469.8)
  Bottom Layer w118.2: 4988.9,4977.7 5205.4,5194.2
  Bottom Layer w153.2: v1(4592.5,3780.8) 5281.5,3780.8
  Bottom Layer w168.9: 4988.9,4745.4 4988.9,4977.7
  Bottom Layer w171.1: 4988.9,4977.7 F3.2@4988.9,5158.8
  Bottom Layer w175.2: 4170.4,4287.9 4669.2,4287.9
  Bottom Layer w177.2: 3459.3,5175.8 F1.1 F1.2 ; 4152.7,4270.1 4170.4,4287.9 ; F3.1 4889.1,5158.8 4988.9,5158.8 F3.2 ; F4.1@5503.2,5194.2 F4.1 F4.2
VIN_B: C2.1 C23.1 D4.2 F5.1 F5.2 F6.1 F6.2 F7.1 F7.2 F8.1 F8.2 pad.COPILOTJ21 R20.1 U6.1 U6.20 | length 10871.1
  Top Layer w10.8: U6.1 5573.5,3971.1
  Top Layer w11.4: C23.1 3485.2,3971.1 U6.1
  Top Layer w16: 3222.5,3971.1 U6.20 U6.1@3485.2,3971.1
  Top Layer w17.5: R20.1 5721.8,4534.6
  Top Layer w19.1: 5721.8,4534.6 C2.1
  Top Layer w19.5: 3209.6,3958.2 3222.5,3971.1
  Top Layer w20.9: v1(3209.6,3833.3) 3209.6,3958.2
  Top Layer w22.5: 5573.5,3971.1 5707.9,4105.5
  Top Layer w23.5: 5721.8,4534.6 5742.4,4534.6
  Top Layer w28.9: 5821.2,4613.4 v1(5821.2,4672.4)
  Top Layer w38.2: D4.2 C2.1@5774.8,4397.6
  Top Layer w40.6: 5742.4,4534.6 5821.2,4613.4
  Top Layer w41.2: 5707.9,4105.5 D4.2
  Top Layer w60: v1(5910.4,5300.7) v1(6063.4,5175.8)
  Top Layer w71.7: C2.1@5774.8,4397.6 C2.1
  Top Layer w89.7: 4460.4,5130.7 4460.4,5260.7
  Top Layer w95.4: 4320.4,4990.7 4460.4,5130.7
  Top Layer w102: 4460.4,5260.7 4670.4,5470.7 v1(4670.4,5580.7)
  Top Layer w147.5: v1(4210.4,4990.7) 4320.4,4990.7
  Top Layer w177.2: F5.1@6150.4,5190.7 6160.4,5180.7 6170.4,5180.7 F5.1 ; F6.2 F7.1
  Bottom Layer w20: 5620.4,5560.7 5630.4,5560.7
  Bottom Layer w23: 5739.1,4754.5 5739.1,4865.9 6049,5175.8 F5.1
  Bottom Layer w67: 3740.4,4970.7 3750.4,4970.7 3760.4,4980.7
  Bottom Layer w68.7: 3200.4,4650.7 3260.4,4710.7
  Bottom Layer w72.3: 3760.4,4980.7 3840.4,4980.7
  Bottom Layer w75.9: 3260.4,4710.7 3280.4,4710.7 3400.4,4830.7
  Bottom Layer w77.3: 3600.4,4830.7 3740.4,4970.7
  Bottom Layer w81.5: 3163.4,3879.5 pad.COPILOTJ21
  Bottom Layer w86.5: pad.COPILOTJ21@3170.4,4450.7 3200.4,4480.7 3200.4,4650.7
  Bottom Layer w92.8: 3850.4,4990.7 v1(4210.4,4990.7)
  Bottom Layer w98.8: v1(4670.4,5580.7) 5590.4,5580.7
  Bottom Layer w117.9: 5890.4,5310.7 v1@5900.4,5300.7
  Bottom Layer w118.1: 5630.4,5560.7 5880.4,5310.7
  Bottom Layer w126.7: 3840.4,4980.7 3850.4,4990.7
  Bottom Layer w146.2: 5880.4,5310.7 5890.4,5310.7
  Bottom Layer w146.5: pad.COPILOTJ21@3160.4,4420.7 3170.4,4430.7 pad.COPILOTJ21@3170.4,4450.7
  Bottom Layer w160.5: pad.COPILOTJ21@3160.4,4420.7 pad.COPILOTJ21
  Bottom Layer w177.2: 3163.4,3879.5 v1(3209.6,3833.3) ; 3400.4,4830.7 3600.4,4830.7 ; 5739.1,4754.5 v1(5821.2,4672.4) ; F5.1 F5.2 F6.1 F6.2 ; F7.1 F7.2 F8.1 F8.2
pads on no net: SW2.2 SW2.3 U1.14 U1.15 U1.16 U1.17 U1.18 U1.19 U1.20 U1.21 U1.22 U1.23 U1.24 U1.25 U1.31 U1.32 U1.34 U1.35 U1.37 U1.40 U1.TP1 U1.TP2 U1.TP3 U1.TP4 U1.TP5 U1.TP6 U4.11 U4.12 U4.13 U4.14 U5.1 U5.3 U5.4 U6.11 U6.12 U6.13 U6.14

## Polygon pours and split planes (outlines as drawn)
GND on Bottom Layer (solid, pour order 2): 3000,3000 3000,6543.3 8826.8,6543.3 8826.8,3000

## Keep-outs
Board Outline Layer:
  lines w10: 3000,3000 3000,6543.3 8826.8,6543.3 8826.8,4454.6 8513.4,4454.6 8513.4,3954.6 8826.8,3954.6 8826.8,3000 3000,3000

## Silkscreen, mask and mechanical layers (free items; w line width, h text height)
Top Silkscreen Layer:
  text "SIG" at 3435,5894.7 h20
  text "GND" at 3631.9,5894.7 h20
  text "PWR" at 3828.7,5894.7 h20
  text "SIG" at 7982.3,5894.7 h20
  text "GND" at 8179.1,5894.7 h20
  text "PWR" at 8376,5894.7 h20
  text "PWR IN A" at 3213.4,5621.7 h28
  text "+" at 3163.4,5591.7 h24
  text "-" at 3360.2,5591.7 h24
  text "PWR IN B" at 3213.4,4301.7 h28
  text "+" at 3163.4,4271.7 h24
  text "-" at 3360.2,4271.7 h24
  text "Made by: Pranet Godavarty Class of 2027" at 5858.4,3361.7 h120